# EAGLE board celaCivky (EAGLE 7.2.0)
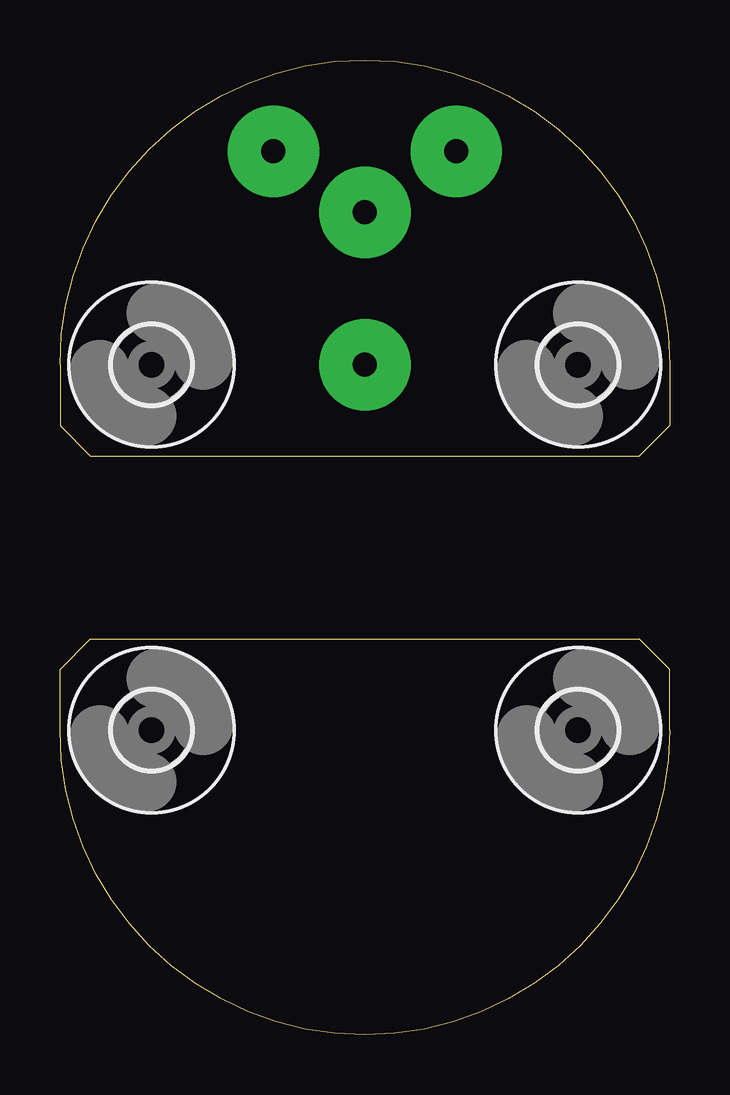
[diagram p0: board, top side]
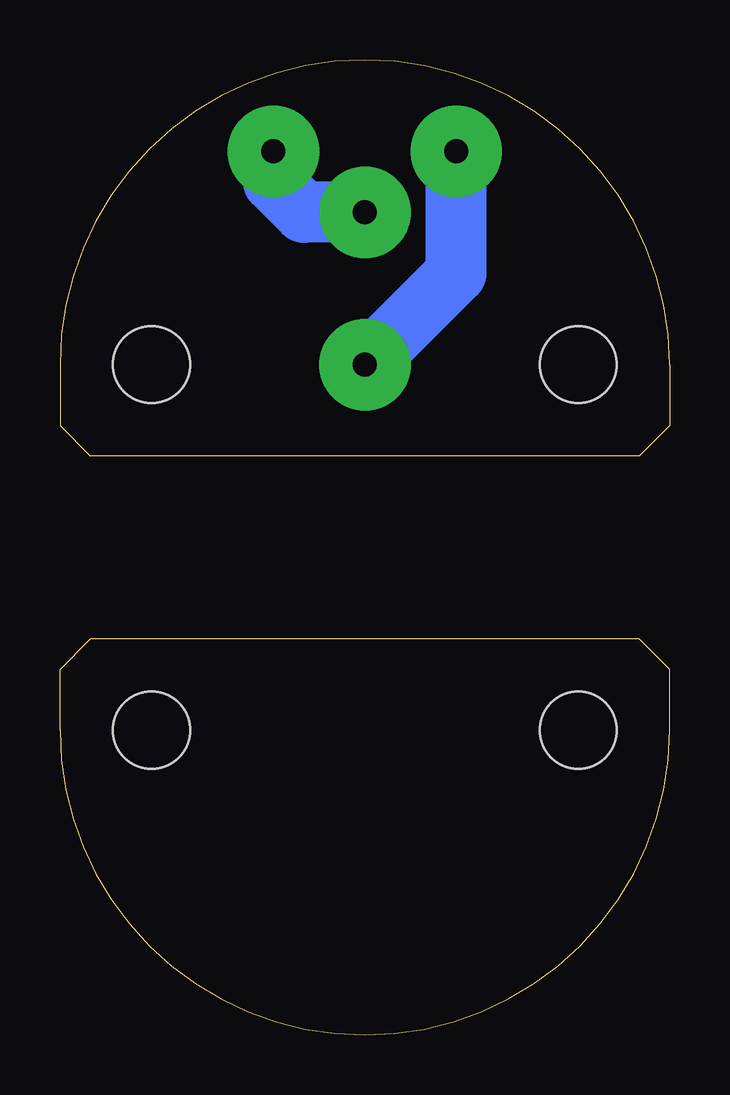
[diagram p1: board, bottom side, seen from below]

Size 25.4 x 40.64 mm. Coordinates in mm from the lower left corner, seen from the top.
Outline: 25.4,12.7 arc-180 0,12.7 0,15.24 1.27,16.51 24.13,16.51 25.4,15.24 25.4,12.7
Outline: 0,27.94 arc-180 25.4,27.94 25.4,25.4 24.13,24.13 1.27,24.13 0,25.4 0,27.94
Copper layers (1*16): Top 0.035mm / dielectric 1.5mm / Bottom 0.035mm
Design rules "default": minimum track width 10mil, minimum drill 24mil, track to track 8mil, track to pad 8mil, pad to pad 8mil, via to via 8mil, smd to smd 8mil, copper to edge 40mil, drill to drill 8mil, minimum pad ring 10mil, minimum via ring 8mil, stop-mask expansion 4mil, vias tented up to drill 0mil, thermal gap 10mil

## Footprints (pad centres in the part's own frame; a part is rotated, then mirrored left to right if it is on the bottom)
3,2 = hole 3.2: 0,0

## Placement (x,y rotation side)
E$1  [3,2]  3.81,12.7 0 top
E$2  [3,2]  21.59,12.7 0 top
E$3  [3,2]  3.81,27.94 0 top
E$4  [3,2]  21.59,27.94 0 top

## Library data of the parts
E$1-E$4 = holes

## Tracks (layer width: path | path; a pad name or v marks a point on that pad's centre or on a via)
S$2  (via drill 1 pad 3.81)
  Bottom 2.54: v12.7,27.94 8.89,31.75 v8.89,36.83
S$3  (via drill 1 pad 3.81)
  Bottom 2.54: v12.7,34.29 15.24,34.29 16.51,35.56 v16.51,36.83